# Altium PCB ADC_Mod_1.PcbDoc
Units mil, origin at the board's own origin, x right, y up, seen from the top; angles counter-clockwise.
Board outline 625.03 x 895.03 mil, 4 copper layers (Top Layer, Signal Layer 1, Signal Layer 2, Bottom Layer), stack 30.634 mil thick; 49 components, 47 nets, 206 pads, 31 vias.
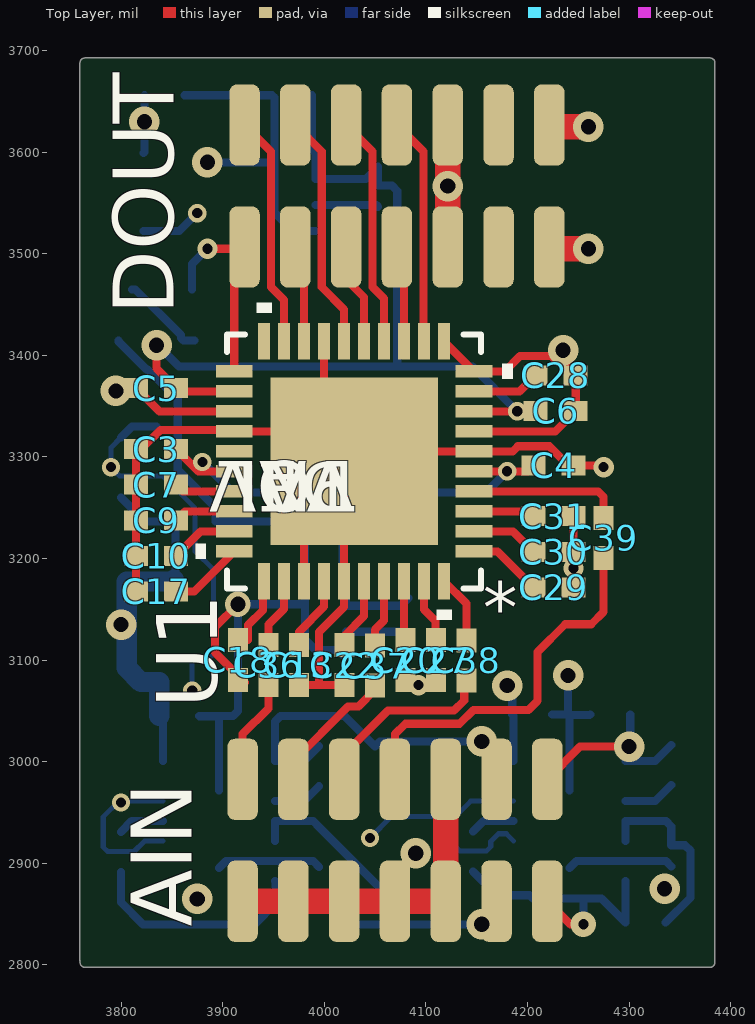
[diagram p0: Top Layer view]
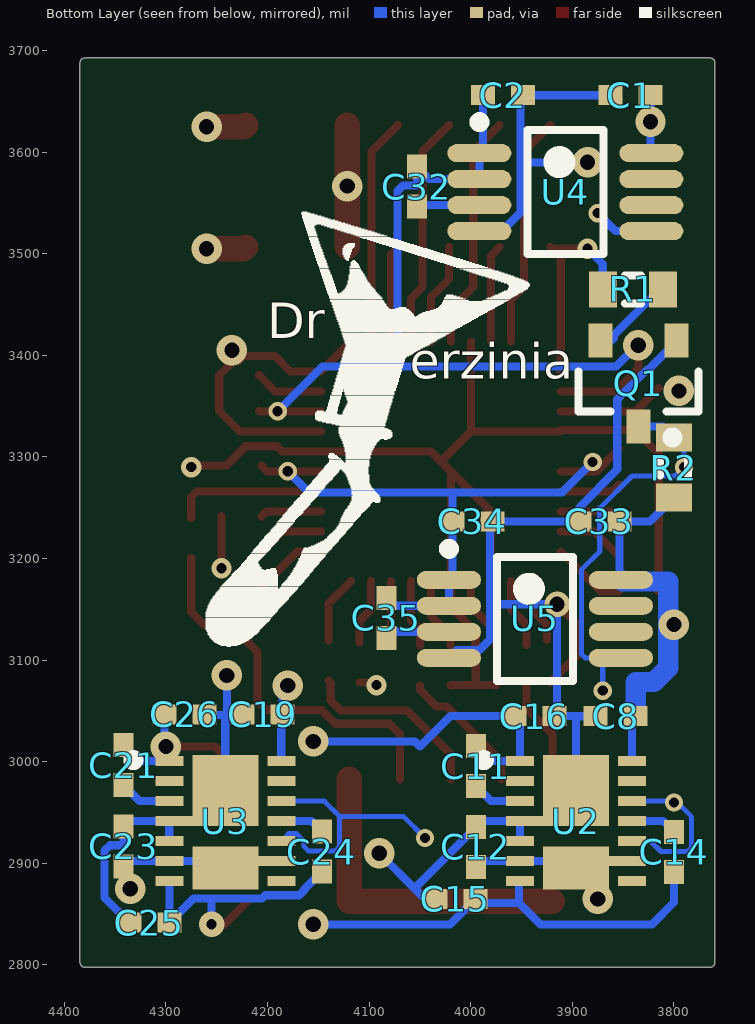
[diagram p1: Bottom Layer view, seen from below]
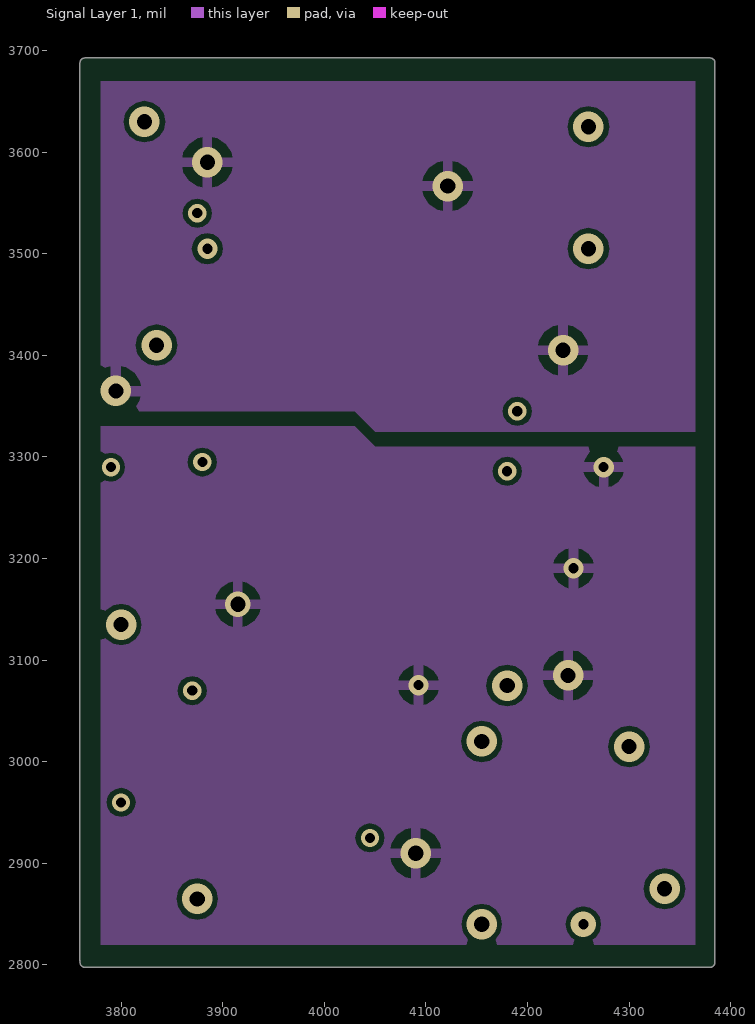
[diagram p2: Signal Layer 1]
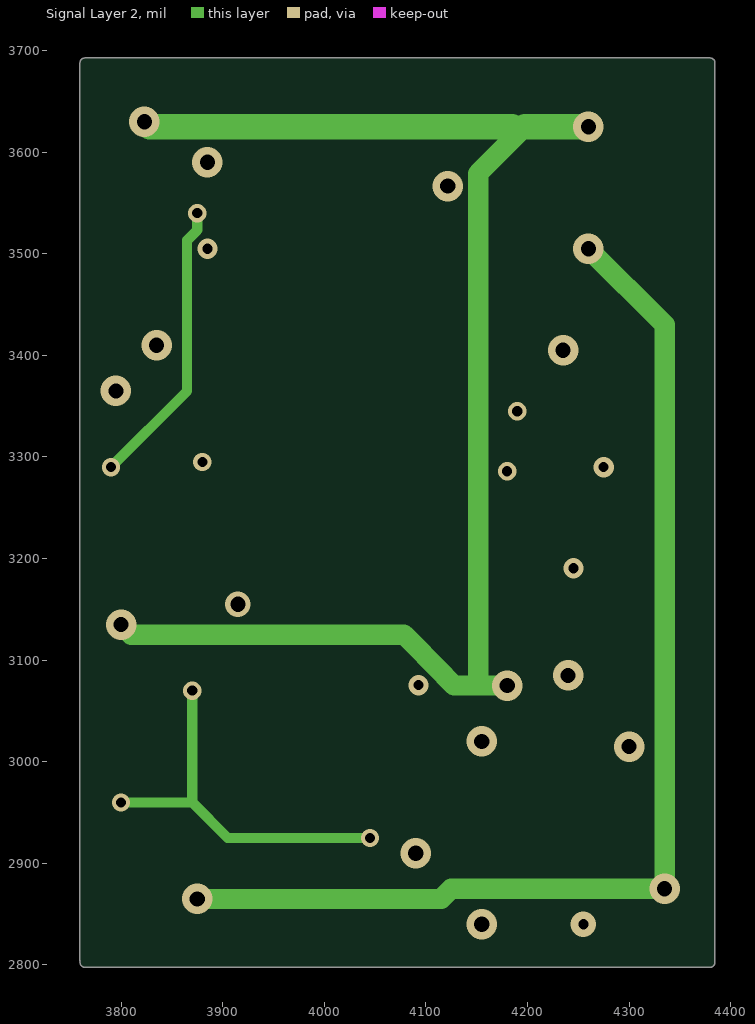
[diagram p3: Signal Layer 2]

## Layer stack, top to bottom
Top Solder: solder mask 0.4, Solder Resist, Dk 3.5
Top Layer: signal copper 1.4
Dielectric 1: core 10, FR-4, Dk 4.2
Signal Layer 1: signal copper 1.417
Dielectric 3: prepreg 5, Dk 4.2
Signal Layer 2: signal copper 1.417
Dielectric 2: core 10, Dk 4.2
Bottom Layer: signal copper 1.4
Bottom Solder: solder mask 0.4, Solder Resist, Dk 3.5

## Board outline
3759.66,2803.75 cw(c3764.57,2804.8) 3759.55,2804.8 3759.55,3687.71 cw(c3764.57,3687.71) 3764.57,3692.72 4379.57,3692.72 cw(c4379.57,3687.71) 4384.58,3687.71 4384.58,2802.71 cw(c4379.57,2802.71) 4379.57,2797.69 3764.57,2797.69 cw(c3764.57,2802.71)

## Design rules (kind name [scope] priority, off if disabled: settings)
Clearance [All] p1: gap=5 ignorepadtopadclearanceinfootprint=FALSE except(0: Arc-Hole Track-Hole SMDPad-Hole THPad-Hole Via-Hole Fill-Hole Poly-Hole Region-Hole Text-Hole)
HoleSize [All] p1: absolutevalues=TRUE maxlimit=100 minlimit=10 maxpercent=80.000 minpercent=20.000
PolygonConnect [All] p1: connectstyle=Relief reliefconductorwidth=10 reliefentries=4 polygonreliefangle="90 Angle" airgapwidth=10
RoomDefinition ADC_Mod_1 [InComponentClass('ADC_Mod_1')] p1: confinementstyle=ConfineIn formatcopy=TRUE lockcomponents=FALSE outline 3764.57,2802.71 4379.57,2802.71 4379.57,3687.71 3764.57,3687.71
RoutingVias [All] p1: holewidth=10 width=20 viastyle="Through Hole" minholewidth=10 minwidth=18 maxholewidth=28 maxwidth=50
SolderMaskExpansion [All] p1: expansion=4
Width [All] p1: maxlimit=25 minlimit=5 preferedwidth=10 toplayer_prefwidth=8 midlayer1_minwidth=10 midlayer2_minwidth=10 bottomlayer_prefwidth=8 minimp=50.000000 maximp=50.000000 favimp=50.000000
29 further rules are at their usual default settings.

## Components (designator, comment, footprint, x,y, rotation, side; value= is the part's Value field where it differs from the comment)
AIN "Header 7X2" CONN_14x2_0.5IN 4069.57,2922.71 r180 top
C1 "Cap" 0402 3842.72,3656.02 r180 bottom value=1uF
C2 "Cap" 0402 3968.35,3656.02 r0 bottom value=10uF
C3 "Cap" 0402 3834.57,3307.71 r0 top value=1uF
C4 "Cap" 0402 4225.67,3291.65 r180 top value=1uF
C5 "Cap" 0402 3834.57,3367.71 r180 top value=1uF
C6 "Cap" 0402 4227.8,3345.39 r0 top value=1uF
C7 "Cap" 0402 3834.57,3272.71 r0 top value=1uF
C8 "Cap" 0402 3857.28,3044.96 r0 bottom value=10uF
C9 "Cap" 0402 3834.57,3237.71 r0 top value=1uF
C10 "Cap" 0402 3834.57,3202.71 r0 top value=1uF
C11 "Cap" 0402 3994.84,2995.59 r90 bottom value=0.01uF
C12 "Cap" 0402 3994.84,2916.22 r90 bottom value=10uF
C13 "Cap" 0402 3975,3095.31 r90 top value=1uF
C14 "Cap" 0402 3799.84,2911.22 r270 bottom value=0.01uF
C15 "Cap" 0402 4015,2865 r180 bottom value=10uF
C16 "Cap" 0402 3937.28,3044.96 r0 bottom value=10uF
C17 "Cap" 0402 3834.57,3167.71 r0 top value=1uF
C18 "Cap" 0402 3915,3100.31 r90 top value=10uF
C19 "Cap" 0402 4204.72,3046.54 r0 bottom value=10uF
C20 "Cap" 0402 4080,3100 r90 top value=1uF
C21 "Cap" 0402 4341.54,2996.65 r90 bottom value=0.01uF
C22 "Cap" 0402 4020,3095 r90 top value=10uF
C23 "Cap" 0402 4341.54,2916.65 r90 bottom value=10uF
C24 "Cap" 0402 4146.54,2911.65 r270 bottom value=0.01uF
C25 "Cap" 0402 4316.22,2841.65 r180 bottom value=10uF
C26 "Cap" 0402 4281.54,3046.65 r0 bottom value=10uF
C27 "Cap" 0402 4110,3100 r90 top value=1uF
C28 "Cap" 0402 4227.8,3380.39 r0 top value=10uF
C29 "Cap" 0402 4225.67,3171.65 r180 top value=10uF
C30 "Cap" 0402 4225.67,3206.65 r180 top value=1uF
C31 "Cap" 0402 4225.67,3241.65 r180 top value=10uF
C32 "Cap" 0402 4053.03,3566.02 r270 bottom value=10uF
C33 "Cap" 0402 3873.35,3236.65 r180 bottom value=1uF
C34 "Cap" 0402 3998.35,3236.65 r0 bottom value=10uF
C35 "Cap" 0402 4083.03,3141.65 r270 bottom value=10uF
C36 "Cap" 0402 3945,3095.31 r90 top value=10uF
C37 "Cap" 0402 4050,3094.68 r90 top value=10uF
C38 "Cap" 0402 4140,3099.68 r90 top value=10uF
C39 "Cap" 0402 4275,3220.31 r90 top value=10uF
DOUT "Header 7X2" CONN_14x2_0.5IN 4071.54,3566.65 r180 top
Q1 "NPN" SOT23_L 3835,3372.32 r270 bottom
R1 "Res3" J1-0603 3840.47,3465 r180 bottom value=1K
R2 "Res3" J1-0603 3800,3289.53 r270 bottom value=10K
U1 "MAXIM11043" 21-0141I_T406600 4029.41,3295.71 r180 top
U2 "LT3032EDE#PBF" LT-DE14MA-14_V 3896.54,2941.54 r180 bottom
U3 "LT3032EDE#PBF" LT-DE14MA-14_V 4241.54,2941.54 r180 bottom
U4 "LT1762EMS8-3.3#PBF" LT-MS8_N 3906.77,3560.71 r180 bottom
U5 "LT1762EMS8-3.3#PBF" LT-MS8_N 3936.77,3140.71 r180 bottom

## Footprints (in the part's own frame and the unit in brackets; to place one, negate y for a bottom-side part, rotate by r counter-clockwise, add the part's x,y. Pads: shape width x height; smd on the part's side, far side on the other; paste and mask are expansions set on the pad)
21-0141I_T406600 [mil]
  rect 36x12 smd: 1(-118,88.58) 2(-118,68.9) 3(-118,49.21) 4(-118,29.53) 5(-118,9.84) 6(-118,-9.84) 7(-118,-29.53) 8(-118,-49.21) 9(-118,-68.9) 10(-118,-88.58) 21(118,-88.58) 22(118,-68.9) 23(118,-49.21) 24(118,-29.53) 25(118,-9.84) 26(118,9.84) 27(118,29.53) 28(118,49.21) 29(118,68.9) 30(118,88.58)
  rect 12x36 smd: 11(-88.58,-118) 12(-68.9,-118) 13(-49.21,-118) 14(-29.53,-118) 15(-9.84,-118) 16(9.84,-118) 17(29.53,-118) 18(49.21,-118) 19(68.9,-118) 20(88.58,-118) 31(88.58,118) 32(68.9,118) 33(49.21,118) 34(29.53,118) 35(9.84,118) 36(-9.84,118) 37(-29.53,118) 38(-49.21,118) 39(-68.9,118) 40(-88.58,118)
  rect 165x165 smd paste-82: 41(0,0)
  silkscreen extent -156,-156 156,156, body extent 0,0 10,10, height 10
0402 [mm] "Chip Capacitor, Body 1.0x0.5mm, IPC High Density"
  rect 0.6x0.5 smd: 1(-0.5,0) 2(0.5,0)
  body extent -0.55,-0.3 0.55,0.3, height 1.3
CONN_14x2_0.5IN [mil]
  rrect50% 30x80 smd: 1(150,60) 2(150,-60) 3(100,60) 4(100,-60) 5(50,60) 6(50,-60) 7(0,60) 8(0,-60) 9(-50,60) 10(-50,-60) 11(-100,60) 12(-100,-60) 13(-150,60) 14(-150,-60)
J1-0603 [mm] "Chip Resistor, Body 1.6x0.8mm, IPC High Density"
  rect 0.7x0.9 smd: 1(-0.75,0) 2(0.75,0)
  silkscreen extent -0.2,-0.35 0.2,0.35, body extent -0.85,-0.48 0.85,0.48, height 0.9
LT-DE14MA-14_V [mm] "DE14MA, 14-Leads, Body 4x3mm, Pitch 0.5mm"
  rect 0.7x0.25 smd: 1(-1.4,1.5) 2(-1.4,1) 3(-1.4,0.5) 4(-1.4,0) 5(-1.4,-0.5) 6(-1.4,-1) 7(-1.4,-1.5) 8(1.4,-1.5) 9(1.4,-1) 10(1.4,-0.5) 11(1.4,0) 12(1.4,0.5) 13(1.4,1) 14(1.4,1.5)
  rect 1.65x1.78 smd: 15(0,0.765)
  rect 1.65x1.07 smd: 16(0,-1.17)
  rect 0.3x0.25 smd: ""(-0.97,0)
  rect 0.5x0.25 smd: ""(0.9,-1)
  silkscreen extent -2.43,1.4 -2.18,1.65, body extent -1.5,-2 1.5,2, height 0.75
LT-MS8_N [mm] "SOP, 8-Leads, Body 3x3mm, Pitch 0.65mm, IPC Medium Density"
  oval 1.6x0.45 smd: 1(-2.15,0.975) 2(-2.15,0.325) 3(-2.15,-0.325) 4(-2.15,-0.975) 5(2.15,-0.975) 6(2.15,-0.325) 7(2.15,0.325) 8(2.15,0.975)
  silkscreen extent -2.28,-1.55 0.95,1.87, body extent -1.55,-1.55 1.55,1.55, height 1.1
SOT23_L [mm] "SOT23, 3-Leads, Body 2.9x1.3mm, Pitch 0.95mm, Lead Span 2.3mm - Reverse Pinning, IPC High Density"
  rect 0.85x0.6 smd: 1(1.075,0) 2(-1.075,-0.95) 3(-1.075,0.95)
  silkscreen extent -0.3,-1.5 1.47,1.5, body extent -0.7,-1.5 0.7,1.5, height 1.1

## Part data
AIN DOUT: "Header, 7-Pin, Dual row", LatestRevisionDate=17-Jul-2002, LatestRevisionNote="Re-released for DXP Platform.", Publisher="Altium Limited"
C1 C2 C3 C4 C5 C6 C7 C8 C9 C10 C11 C12 C13 C14 C15 C16 C17 C18 C19 C20 C21 C22 C23 C24 C25 C26 C27 C28 C29 C30 C31 C32 C33 C34 C35 C36 C37 C38 C39: "Capacitor", LatestRevisionDate=17-Jul-2002, LatestRevisionNote="Re-released for DXP Platform.", PackageDescription="Radial Cap, Thru-Hole; 2 Leads; 0.3 in Pin Spacing", PackageReference=RAD-0.3, Published=8-Jun-2000, Publisher="Altium Limited"
Q1: "NPN Bipolar Transistor", Code_JEDEC=TO-226-AA, LatestRevisionDate=17-Jul-2002, LatestRevisionNote="Re-released for DXP Platform.", PackageDescription="TO, Flat Index; 3 In-Line, Axial Leads; Body Dia. 4.8mm; Leads 0.55 x 0.51 mm (max)", PackageReference=TO-226-AA, Published=8-Jun-2000, Publisher="Altium Limited"
R1 R2: "Resistor", LatestRevisionDate=29-May-2009, LatestRevisionNote="IPC-7351 Footprint Added.", PackageDescription="Chip Resistor", PackageReference=J1-0603, Published=8-Jun-2000, Publisher="Altium Limited"
U2 U3: "Dual 150 mA Positive / Negative Low Noise Low Dropout Linear Regulator, +/-2.3 to +/-20 V Vin, Adjustable Vout, 14-pin SON (DE14MA-14), -40 to 125 degC, Pb-Free", Dropout Voltage(V)=0.3, Manufacturer="Linear Technology", Output Voltage=Adj,-Adj, Shutdown Current(uA)=0.1, Supplier Part Number 1=LT3032EDE#PBF-ND, ComponentLink1Description="Manufacturer URL", ComponentLink1URL=http://www.linear.com/, ComponentLink2Description=Datasheet, ComponentLink2URL=http://cds.linear.com/docs/en/datasheet/3032fd.pdf, ComponentLink3Description="Package Specification", ComponentLink3URL=http://cds.linear.com/docs/en/packaging/DFN_14_05-08-1731.pdf, DatasheetVersion="Rev. D", Discrete Pass Element=no, Iout(mA)=150, Isupply(mA)=0.025, Mounting Technology="Surface Mount", Noise(uV)=30, Number of Outputs=2, PackageDescription="14-Pin Plastic DFN, Body 4 x 3 mm, Pitch 0.5 mm", PackageReference=DE14MA-14, PackageVersion="Rev. A, 06/2010", PartNumber=LT3032EDE#PBF, PSRR(dB)=68, RoHS=TRUE, Supplier 1=Digi-Key, Supplier 2=Farnell, Supplier 3=Newark, Supplier Part Number 2=2289423, Supplier Part Number 3=52R9875, Vin Max(V)=+/-20, Vin Min(V)=+/-2.3, Vout Max(V)=+/-20, Vout Min(V)=+/-1.22
U4 U5: "150 mA, Low Noise, LDO Micropower Regulator, 1.8 to 20 V Vin, 3.3 V Vout, 8-pin SOP (MS8-8), -40 to 125 degC, Pb-Free", Dropout Voltage(V)=0.27, Manufacturer="Linear Technology", Output Voltage="3.3 V", Shutdown Current(uA)=1, Supplier Part Number 1=LT1762EMS8-3.3#PBF-ND, ComponentLink1Description="Manufacturer URL", ComponentLink1URL=http://www.linear.com/, ComponentLink2Description=Datasheet, ComponentLink2URL=http://cds.linear.com/docs/en/datasheet/1762fa.pdf, ComponentLink3Description="Package Specification", ComponentLink3URL=http://cds.linear.com/docs/en/packaging/05081660_G_MS8.pdf, DatasheetVersion="Rev. A", Discrete Pass Element=no, Iout(mA)=150, Isupply(mA)=0.025, Mounting Technology="Surface Mount", Noise(uV)=20, Number of Outputs=1, PackageDescription="8-Pin Plastic MSOP, Body 3 x 3 mm, Pitch 0.65 mm", PackageReference=MS8, PackageVersion="Rev. G, 05/2013", PartNumber=LT1762EMS8-3.3#PBF, PSRR(dB)=65, RoHS=TRUE, Supplier 1=Digi-Key, Supplier 2=Farnell, Supplier 3=Newark, Supplier Part Number 2=1273611, Supplier Part Number 3=57M6001, Vin Max(V)=20, Vin Min(V)=1.8

## Via types
v1: diameter 30, hole 15, Top Layer to Bottom Layer, 17 vias
v2: diameter 18, hole 10, Top Layer to Bottom Layer, 8 vias
v3: diameter 20, hole 10, Top Layer to Bottom Layer, 4 vias
v4: diameter 25, hole 10, Top Layer to Bottom Layer, 1 vias
v5: diameter 25, hole 15, Top Layer to Bottom Layer, 1 vias

## Nets (pads, with @x,y where several pads share a name; then routed paths per layer and width w, separated by ;. In a path a pad name is that pad's centre, name@x,y a point inside that pad or via, vN(x,y) a via of type N, cw(c..) or ccw(c..) an arc to the next point about the centre after c; other vN are vias at no path point)
3.3VA: AIN.12 C11.2 C16.2 U2.1 | length 308.4
  Bottom Layer w8: C11.2 3980.16,3000.59 U2.1 3951.65,3039.65 C16.2 4020.04,3044.96 4050,3015 4055,3020 v1(4155,3020)
3.3VA2: C3.2 C4.2 C34.2 C35.1 U1.5 U1.26 U5.1 U5.2 | length 626
  Top Layer w8: C3.2 3876.09,3285.87 U1.26 ; U1.5 v2(4180,3285.87) 4200.2,3285.87 C4.2
  Bottom Layer w8: v2(3880,3295) 3910,3265 4018.03,3265 ; C35.1 4075.2,3153.5 U5.2 U5.1 4018.03,3182.48 C34.2 4018.03,3265 ; v2(4180,3285.87) 4159.13,3265 4018.03,3265
3.3VD: C2.2 C5.1 C6.1 C32.1 U1.8 U1.22 U4.1 U4.2 | length 916
  Top Layer w8: v1(3835,3410) 3835,3386.96 C5.1 3857.35,3364.61 U1.22 ; U1.8 v2(4190,3344.92) 4207.64,3344.92 C6.1
  Bottom Layer w8: v1(3835,3410) 3835.78,3410 3856.86,3388.91 4075,3388.91 ; C2.2 3988.03,3602.48 U4.1 U4.2 4040.83,3573.5 C32.1 4053.03,3567.15 4066.6,3567.15 4071.87,3561.88 4071.87,3392.04 4075,3388.91 ; v2(4190,3344.92) 4146.01,3388.91 4075,3388.91
5VA: AIN.14 C21.2 C26.2 U3.1 | length 193.2
  Top Layer w8: AIN.14 4251.86,3015 v1(4300,3015)
  Bottom Layer w8: C26.2 4301.22,3005.16 U3.1 4325.79,3000.59 C21.2
-3.3VA: AIN.11 C14.2 C15.2 U2.7 | length 436.5
  Bottom Layer w8: C14.2 3799.84,2861.77 3821.65,2839.96 3931.34,2839.96 3952.28,2860.91 ; U2.7 3952.28,2881.85 3952.28,2860.91 ; v1(4155,2840) 4020.32,2840 C15.2 3991.22,2860.91 3952.28,2860.91
-5VA: AIN.13 C24.2 C25.2 U3.7 | length 282.6
  Top Layer w8: AIN.13 4242.28,2840 v4(4255,2840)
  Bottom Layer w8: C24.2 4163.64,2874.87 4163.64,2873.83 4168.91,2868.56 4202.18,2868.56 4205.33,2865.41 4255,2865.41 ; v4(4255,2840) 4255,2865.41 ; U3.7 4296.54,2882.36 C25.2 4272.78,2865.41 4255,2865.41
-V: C12.1 C23.1 DOUT.13 U2.6 U2.9 U2.16 U2.@3861.1,2902.17 U3.6 U3.9 U3.16 U3.@4206.1,2902.17 | length 1372.7
  Top Layer w25: DOUT.13 4223.19,3505 v1(4260,3505)
  Signal Layer 2 w20: v1(3875,2865) 4115,2865 4125,2875 v1(4335,2875) 4335,3430 v1(4260,3505)
  Bottom Layer w8: U2.16 3903.23,2902.17 U2.6 3989.21,2902.17 C12.1 ; U3.16 4248.23,2902.17 U3.6 4336.34,2902.17 C23.1
AGND: AIN.1 AIN.3 AIN.5 AIN.7 AIN.9 AIN.10 C3.1 C4.1 C7.1 C8.2 C9.1 C10.1 C12.2 C13.1 C15.1 C16.1 C17.1 C18.1 C19.2 C20.1 C22.1 C23.2 C25.1 C26.1 C27.1 C29.1 C30.1 C31.1 C33.1 C34.1 Q1.3 U1.6 U1.17 U1.24 U1.33 U1.35 U1.41 U2.4 U2.5 U2.15 U2.@3934.72,2941.54 U3.4 U3.5 U3.15 U3.@4279.72,2941.54 U5.4 | length 2933.1
  Top Layer w8: C17.1 C10.1 C9.1 C7.1 C3.1 3819.87,3307.71 3838.71,3326.55 3911.41,3326.55 U1.24 U1.41@3999.88,3325.24 ; v5(3915,3155) 3892.5,3132.5 3892.5,3107.5 C18.1@3921.98,3078.02 ; C13.1@3975.31,3075.32 C13.1 3995,3075.63 ; U1.33 3980.2,3246.5 U1.41@4019.57,3285.87 ; U1.17 U1.41@3999.88,3325.24 ; C22.1 4019.68,3075.63 3995,3075.63 ; v3(4092.8,3075.39) 4095.43,3078.02 C27.1@4109.57,3078.02 ; v3(4245.35,3190.39) C30.1 C31.1 ; v3(4275,3290) 4273.35,3291.65 C4.1 4240.37,3291.65 4221.52,3310.5 4190.45,3310.5 4185.5,3305.55 U1.6 4039.25,3305.55 U1.41 ; 3995,3075.63 3995,3127.6 4019.57,3152.17 U1.35 U1.41@4019.57,3285.87 ; U1.41@3999.88,3325.24 U1.41 ; U1.41@4019.57,3285.87 U1.41
  Top Layer w25: AIN.1 AIN.3 AIN.5 AIN.7 AIN.9 AIN.10
  Bottom Layer w8: Q1.3 3797.6,3413.46 3825.06,3386 3826.24,3386 3855.81,3356.43 3855.81,3287.6 3893.03,3250.38 C33.1 C34.1 3980.92,3234.39 3980.92,3155 ; C8.2 3877.09,3044.84 3896.54,3044.84 ; U2.15 3896.54,3044.84 ; U2.5 U2.4 3989.21,2941.54 C12.2 4055.37,2875.37 ; U5.4 4013.68,3110.06 3991.38,3110.06 3980.92,3120.52 3980.92,3155 ; C15.1 4045,2865 4055.37,2875.37 ; v1(4090,2910) 4055.37,2875.37 ; C19.2 4241.02,3046.54 ; v1(4240,3085) 4240,3047.56 4241.02,3046.54 ; U3.15 4241.54,3046.02 ; C26.1 4261.22,3046.02 4241.54,3046.02 ; U3.5 U3.4 4336.34,2941.54 C23.2 4341.54,2917.78 4355.11,2917.78 4360.38,2912.51 4360.38,2866.13 C25.1 ; 3896.54,3044.84 3896.65,3044.96 3910,3044.96 3915,3049.96 v5(3915,3155) 3980.92,3155 ; 4241.02,3046.54 4241.54,3046.02
DGND: C1.1 C2.1 C5.2 C6.2 C28.2 DOUT.9 DOUT.10 U1.7 U1.10 U1.11 U1.23 U4.4 | length 841.7
  Top Layer w8: C5.2 3837.67,3344.92 U1.23 ; U1.11 U1.10 4177.63,3384.29 4192.57,3399.24 4223.65,3399.24 4228.92,3393.96 4233.91,3393.96 C28.2 C6.2 4227.32,3325.24 U1.7
  Top Layer w25: DOUT.9 v1(4121.54,3566.65) DOUT.10
  Bottom Layer w8: C1.1 C2.1 3950.92,3653.76 3950.92,3590 ; v1(3885,3590) 3950.92,3590 ; U4.4 3969.11,3522.32 3950.92,3540.52 3950.92,3590
  other v1: 3795,3365 4235,3405
NetAIN_2: AIN.2 C36.1 | length 103.5
  Top Layer w8: AIN.2 3919.57,3027.17 3945,3052.6 C36.1
NetAIN_4: AIN.4 C37.1 | length 131.5
  Top Layer w8: AIN.4 3969.57,3000.55 4023.52,3054.5 4033.57,3054.5 4050,3070.93 C37.1
NetAIN_6: AIN.6 C38.1 | length 185.3
  Top Layer w8: AIN.6 4019.57,3007.17 4062.8,3050.39 4127.8,3050.39 4137.8,3060.39 4137.8,3077.8 C38.1
NetAIN_8: AIN.8 C39.1 | length 381
  Top Layer w8: AIN.8 4069.57,3027.17 4079.8,3037.39 4133.18,3037.39 4146.79,3051 4201,3051 4210,3060 4210,3108.19 4237.2,3135.39 4262.8,3135.39 4275,3147.6 C39.1
NetC7_2: C7.2 U1.27 | length 59.9
  Top Layer w8: C7.2 3860.78,3266.18 U1.27
NetC9_2: C9.2 U1.28 | length 60.8
  Top Layer w8: C9.2 3863.04,3246.5 U1.28
NetC10_2: C10.2 U1.29 | length 67.1
  Top Layer w8: C10.2 3878.35,3226.81 U1.29
NetC11_1: C11.1 U2.3 | length 49.3
  Bottom Layer w8: U2.3 3980.16,2961.22 C11.1
NetC13_2: C13.2 U1.34 | length 73
  Top Layer w8: C13.2 3975,3127.87 3999.88,3152.76 U1.34
NetC14_1: C14.1 U2.11 | length 46
  Bottom Layer w8: C14.1 3810.47,2941.54 U2.11
NetC17_2: C17.2 U1.30 | length 73.5
  Top Layer w8: C17.2 3871.99,3167.71 U1.30
NetC18_2: C18.2 U1.31 | length 64.3
  Top Layer w8: 3925,3120 3925,3134.59 3939.57,3149.16 3939.57,3176.45 U1.31
NetC20_2: C20.2 U1.38 | length 61.4
  Top Layer w8: U1.38 4078.62,3121.45 4080,3122.83 C20.2
NetC21_1: C21.1 U3.3 | length 51.4
  Bottom Layer w8: U3.3 4325.79,2961.22 C21.1
NetC22_2: C22.2 U1.36 | length 71
  Top Layer w8: C22.2 4020,3124.07 4039.25,3143.32 U1.36
NetC24_1: C24.1 U3.11 | length 44.1
  Bottom Layer w8: C24.1 4156.73,2941.54 U3.11
NetC27_2: C27.2 U1.39 | length 65
  Top Layer w8: U1.39 4098.31,3149.88 4109.57,3138.62 C27.2@4109.57,3117.39
NetC28_1: C28.1 U1.9 | length 67.2
  Top Layer w8: U1.9 4192.32,3364.61 C28.1
NetC29_2: C29.2 U1.1 | length 73.3
  Top Layer w8: U1.1 4170.51,3207.13 C29.2
NetC30_2: C30.2 U1.2 | length 66.9
  Top Layer w8: U1.2 4185.83,3226.81 C30.2
NetC31_2: C31.2 U1.3 | length 60.6
  Top Layer w8: U1.3 4201.14,3246.5 C31.2
NetC32_2: C32.2 U4.3 | length 62.3
  Bottom Layer w8: U4.3 4051.46,3547.91 C32.2
NetC35_2: C35.2 U5.3 | length 64.1
  Bottom Layer w8: U5.3 4077.09,3127.91 C35.2
NetC36_2: C36.2 U1.32 | length 69.1
  Top Layer w8: C36.2 3945,3135 3960.51,3150.51 U1.32
NetC37_2: C37.2 U1.37 | length 67
  Top Layer w8: C37.2 4050,3130 4058.94,3138.94 U1.37
NetC38_2: C38.2 U1.40 | length 67.5
  Top Layer w8: U1.40 4140,3155.7 C38.2
NetC39_2: C39.2 U1.4 | length 150.6
  Top Layer w8: U1.4 4269.63,3266.18 4275,3260.81 C39.2
NetDOUT_1: DOUT.1 R1.1 U1.21 | length 207.7
  Top Layer w8: v3(3885,3505) DOUT.1@3919.88,3505 ; U1.21 3911.41,3496.53 DOUT.1@3919.88,3505 ; DOUT.1 DOUT.1@3919.88,3505
  Bottom Layer w8: R1.1 3870,3490 v3(3885,3505)
NetDOUT_2: DOUT.2 U1.19 | length 229.1
  Top Layer w8: DOUT.2 3947.54,3600.65 3947.54,3467.32 3960.51,3454.34 U1.19
NetDOUT_3: DOUT.3 U1.18 | length 96.5
  Top Layer w8: DOUT.3 3980.2,3497.99 U1.18
NetDOUT_4: DOUT.4 U1.16 | length 232.8
  Top Layer w8: DOUT.4 3997.54,3600.65 3997.54,3467.32 4019.57,3445.29 U1.16
NetDOUT_5: DOUT.5 U1.15 | length 100.3
  Top Layer w8: DOUT.5 4021.54,3474.93 4039.25,3457.22 U1.15
NetDOUT_6: DOUT.6 U1.14 | length 228.4
  Top Layer w8: DOUT.6 4047.54,3600.65 4047.54,3467.32 4058.94,3455.92 U1.14
NetDOUT_7: DOUT.7 U1.13 | length 95.9
  Top Layer w8: DOUT.7 4078.62,3499.57 U1.13
NetDOUT_8: DOUT.8 U1.12 | length 224
  Top Layer w8: DOUT.8 4097.54,3600.65 4097.54,3414.48 U1.12
NetQ1_1: Q1.1 R2.1 U2.10 U2.12 U3.10 U3.12 U4.5 U5.5 | length 1512.2
  Signal Layer 2 w10: v2(3790,3290) 3865,3365 3865,3513.28 3875,3523.28 v2(3875,3540) ; v2(3800,2960) 3870,2960 ; v2(3870,3070) 3870,2960 ; v2(4045,2925) 3905,2925 3870,2960
  Bottom Layer w5: R2.1 3790,3309.06 v2(3790,3290) 3798.72,3281.28 3841.3,3281.28 3872.97,3249.6 3872.97,3207.03 3891.12,3188.88 3891.12,3106.12 3887.32,3102.32 3869.72,3102.32 3870,3102.05 v2(3870,3070) ; U2.10 3823.05,2921.85 3812.79,2911.59 3786.89,2911.59 3782.5,2915.99 3782.5,2945.82 3797.9,2961.22 U2.12 ; v2(4045,2925) 4066.26,2946.26 4129.19,2946.26 ; U3.10 4179.15,2929.11 4171.44,2929.11 4163.88,2921.55 4163.88,2916.42 4159.48,2912.03 4133.59,2912.03 4129.19,2916.42 4129.19,2946.26 ; U3.12 4144.16,2961.22 4129.19,2946.26
  Bottom Layer w8: R2.1 3810.94,3330 Q1.1 ; U4.5 3857.32,3522.32 v2(3875,3540)
NetQ1_2: Q1.2 R1.2 | length 84.1
  Bottom Layer w8: R1.2 3813.94,3465 3859,3419.94 3859,3416.94 3861.3,3414.65 Q1.2
V: C1.2 C8.1 C19.1 C33.2 DOUT.14 R2.2 U2.14 U3.14 U4.8 U5.8 | length 1946.8
  Top Layer w25: DOUT.14 4223.19,3625 v1(4260,3625)
  Signal Layer 2 w20: v1(3800,3135) 3810,3125 4078.54,3125 4117.8,3085.75 4117.8,3084.96 4127.76,3075 4155,3075 ; v1(4180,3075) 4155,3075 ; 4197.46,3625 4151.54,3579.08 4151.54,3078.46 4155,3075
  Signal Layer 2 w25: v1(3823.03,3630) 3828.03,3625 4185,3625 ; 4197.46,3625 v1(4260,3625)
  Bottom Layer w8: R2.2 3823.35,3236.65 C33.2 3853.66,3180.63 U5.8 ; U4.8 3823.03,3600 v1(3823.03,3630) C1.2 ; C8.1 3841.42,3041.14 U2.14 ; v1(4180,3075) 4185.04,3069.96 C19.1 4186.42,3045.16 U3.14
  Bottom Layer w20: C8.1 3837.6,3078.46 3819.61,3078.46 3805.63,3092.44 3805.63,3177.36 3850.39,3177.36 U5.8
pads on no net: DOUT.11 DOUT.12 U1.20 U1.25 U2.2 U2.8 U2.13 U3.2 U3.8 U3.13 U4.6 U4.7 U5.6 U5.7

## Polygon pours and split planes (outlines as drawn)
DGND on Signal Layer 1 "DGND_L02_P004" (solid, remove dead copper, pour order 4): 4365,3325 4050,3325 4030,3345 3780,3345 3780,3670 4365,3670
AGND on Signal Layer 1 "AGND_L02_P000" (solid, remove dead copper, pour order 0): 4365,2820 3780,2820 3780,3330 4030,3330 4050,3310 4365,3310

## Silkscreen, mask and mechanical layers (free items; w line width, h text height)
Bottom Overlay:
  drawing of 735 lines, arcs and shapes, not listed
  text "Dr" at 4200,3405 h60
  text "erzinia" at 4060,3365 h60
Mechanical 1:
  lines w10: 3764.57,2802.71 4379.57,2802.71 4379.57,3687.71 3764.57,3687.71 3764.57,2804.8

## Text inside footprints (layer, text, board x,y; h text height)
U1: Top Overlay "TOL" at 4029.41,3295.71 h50 r180; Top Overlay "VAL" at 4029.41,3295.71 h50 r180; Top Overlay "DEV" at 4029.41,3295.71 h50 r180; Top Overlay "PN" at 4029.41,3295.71 h50 r180; Top Overlay "*" at 4190.41,3197.28 h50 r180; Mechanical 13 "RefDes2" at 4029.41,3295.71 h50 r180; Mechanical 13 "*" at 4129.41,3197.28 h50 r180